# Altium PCB PCB1.PcbDoc
Units mm, origin at the board's own origin, x right, y up, seen from the top; angles counter-clockwise.
Board outline 76.2 x 78.74 mm, 2 copper layers (Top Layer, Bottom Layer); 10 components, 8 nets, 28 pads, 4 vias.
Unrouted connection lines stored in the file: 7.
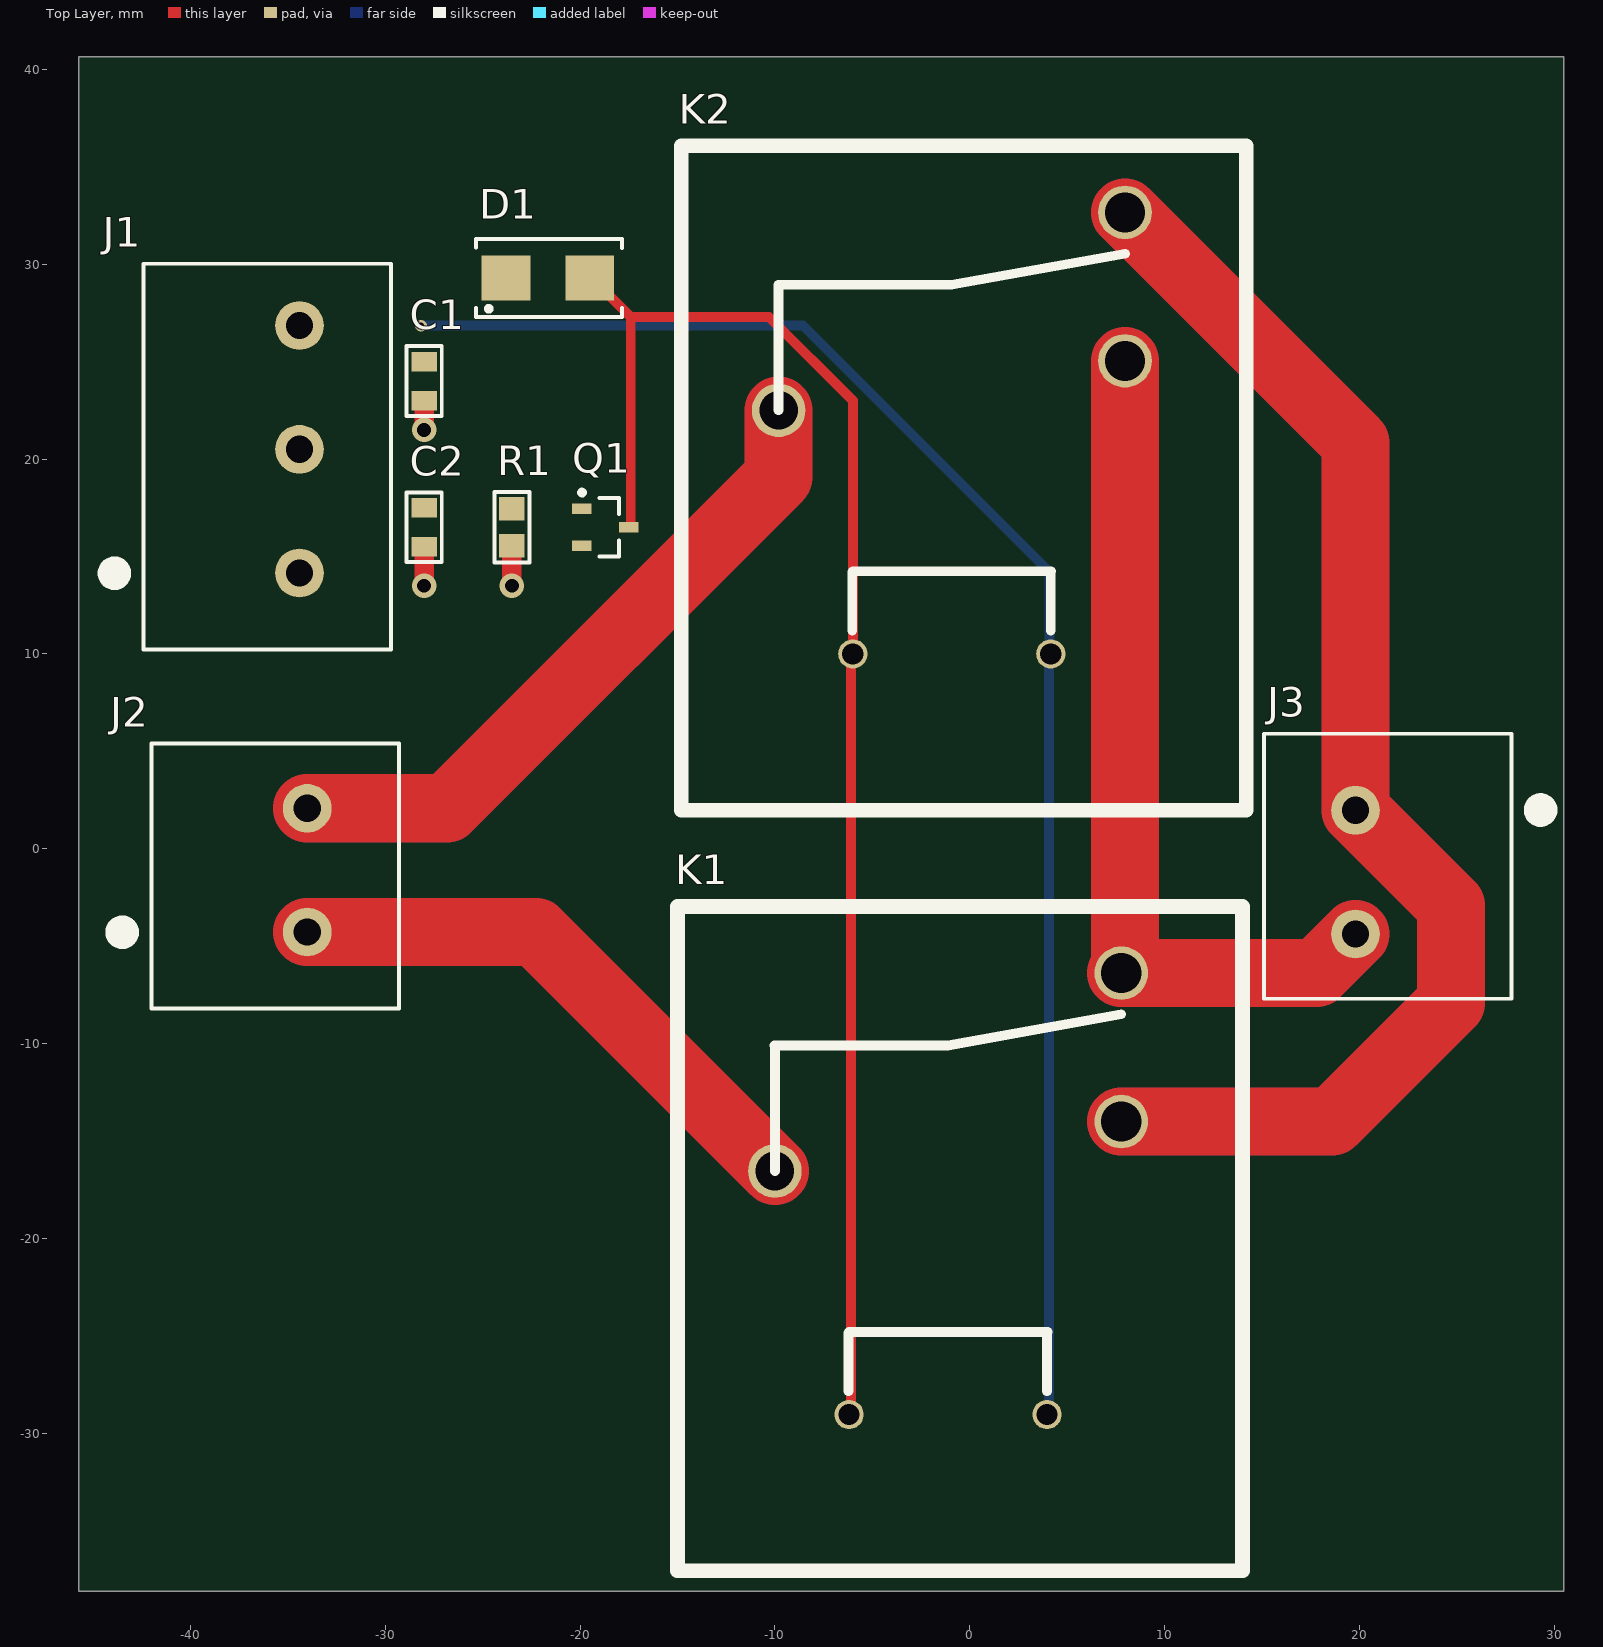
[diagram p0: Top Layer view]
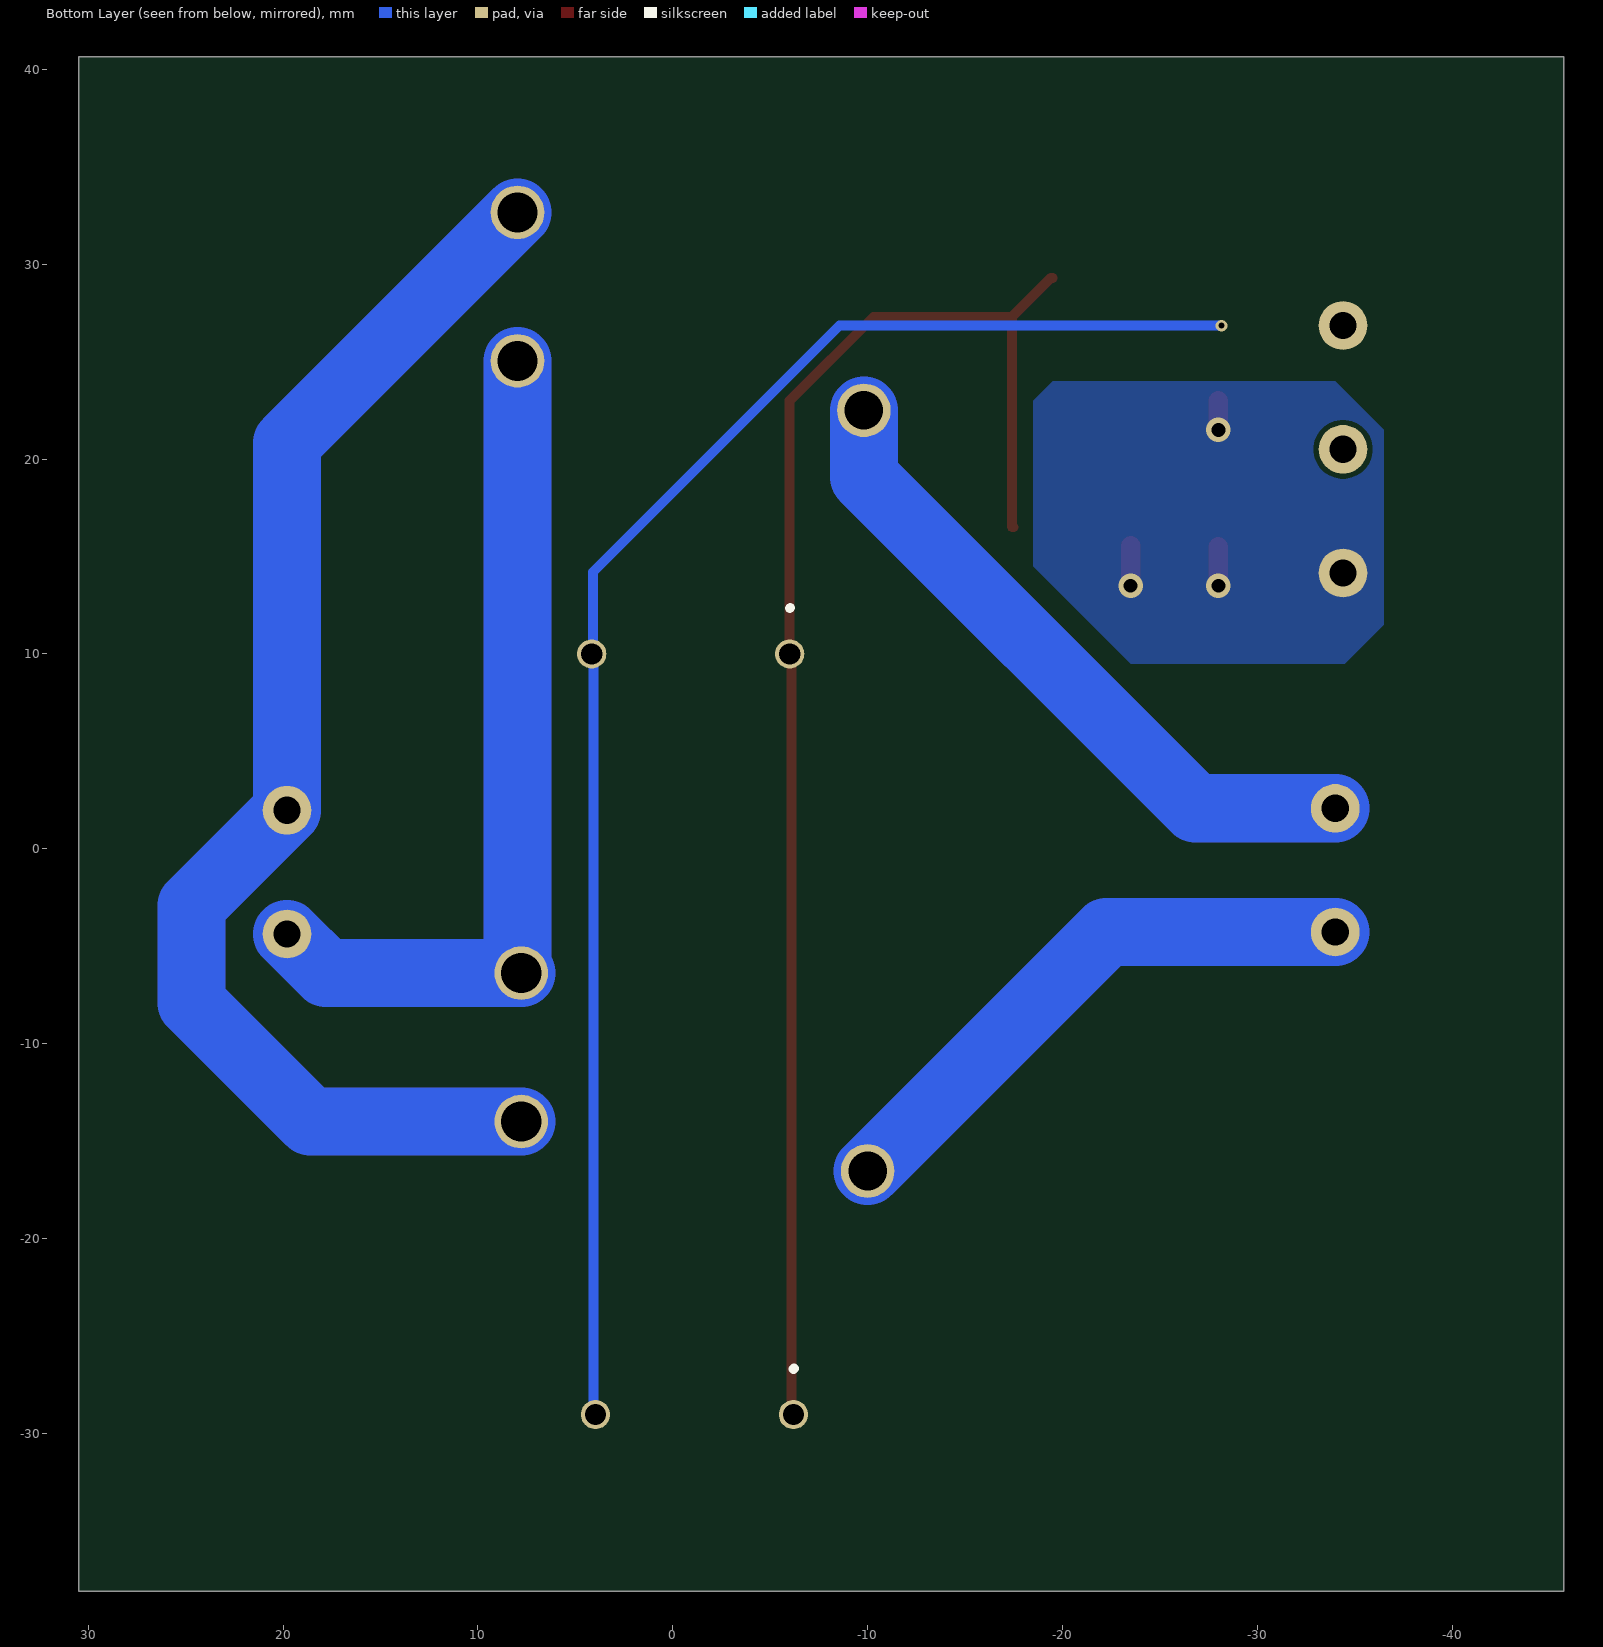
[diagram p1: Bottom Layer view, seen from below]
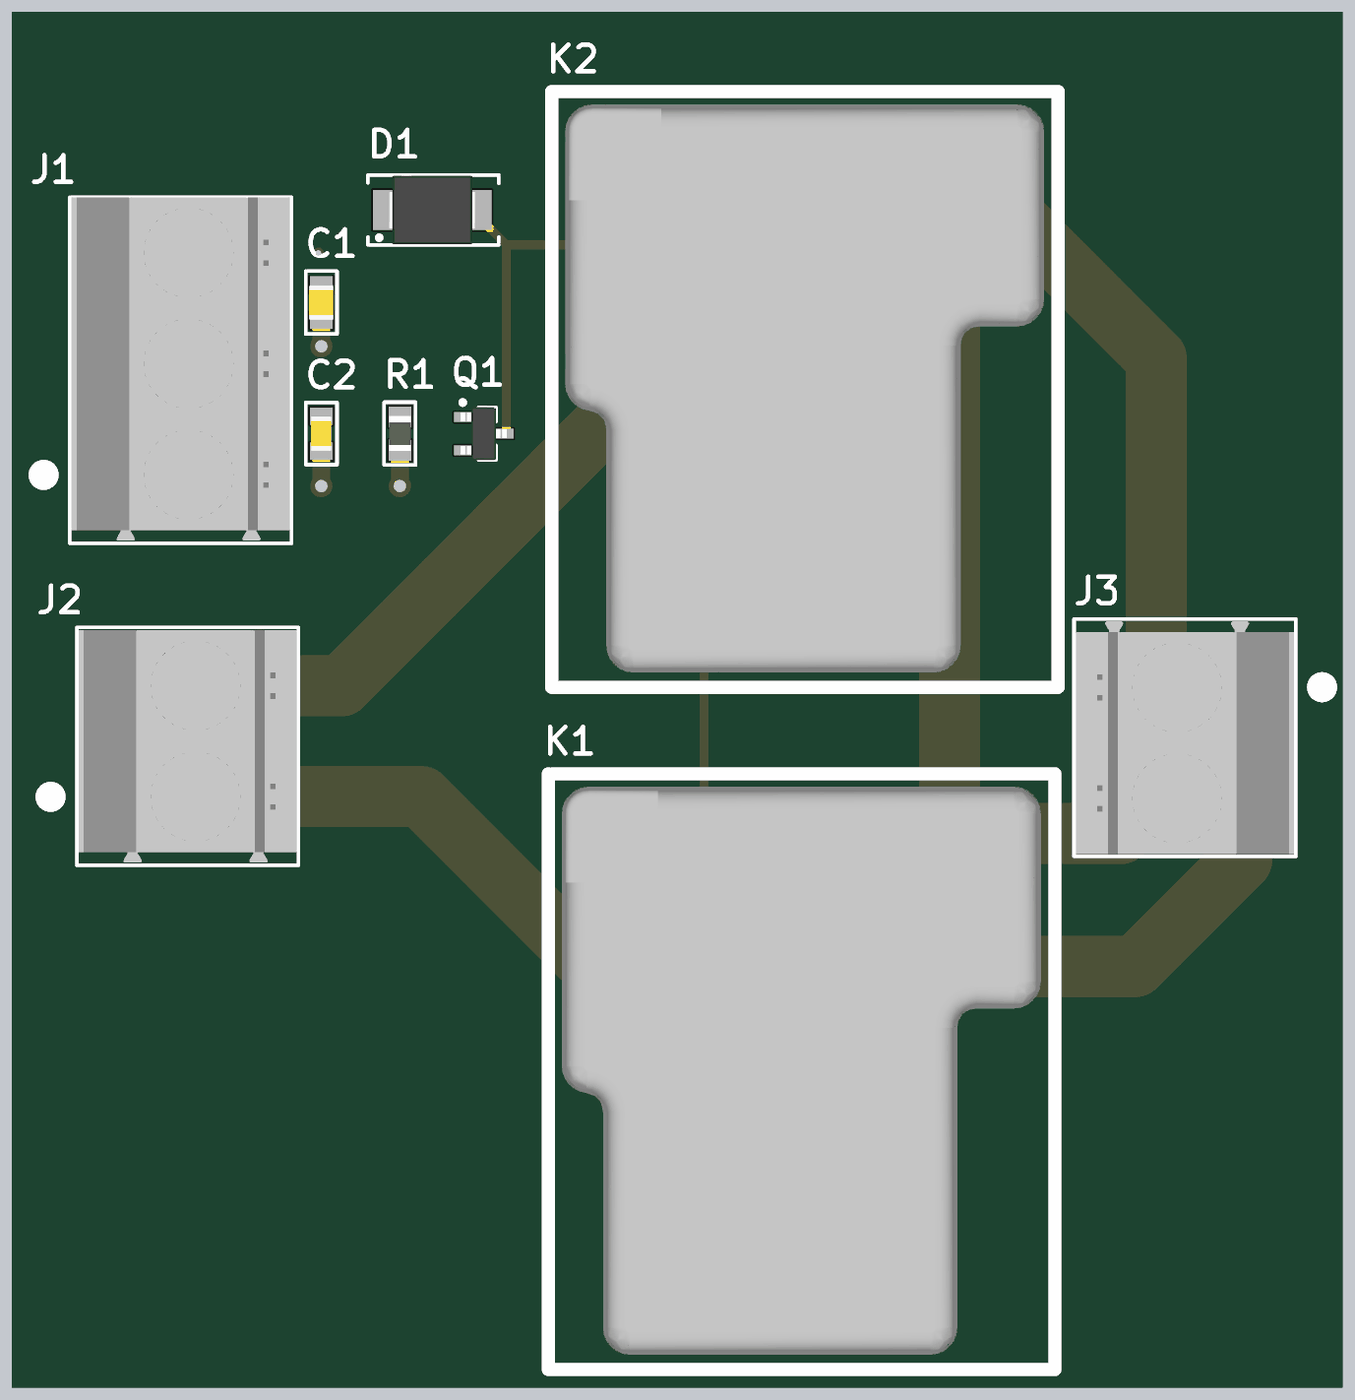
[diagram p2: 3D render of the assembled board from above, using the file's embedded part models]

## Layer stack, top to bottom
Top Solder: solder mask 0.0102, Solder Resist, Dk 3.5
Top Layer: signal copper 0.0356
Dielectric 1: dielectric 0.32, FR-4, Dk 4.8
Bottom Layer: signal copper 0.0356
Bottom Solder: solder mask 0.0102, Solder Resist, Dk 3.5

## Board outline
-45.72,40.64 -45.72,-38.1 30.48,-38.1 30.48,40.64

## Design rules (kind name [scope] priority, off if disabled: settings)
Clearance [All] p1: gap=0.254 ignorepadtopadclearanceinfootprint=FALSE except(0: Arc-Hole Track-Hole SMDPad-Hole THPad-Hole Via-Hole Fill-Hole Poly-Hole Region-Hole Text-Hole)
Height [All] p1: minheight=0 maxheight=127 prefheight=12.7
HoleSize [All] p1: absolutevalues=TRUE maxlimit=25.4 minlimit=0.025 maxpercent=80.000 minpercent=20.000
PolygonConnect [All] p1: connectstyle=Direct reliefconductorwidth=0.254 reliefentries=4 polygonreliefangle="90 Angle" airgapwidth=0.254
RoutingVias [All] p1: holewidth=0.711 width=1.27 viastyle="Through Hole" minholewidth=0.711 minwidth=1.27 maxholewidth=0.711 maxwidth=1.27
SolderMaskExpansion [All] p1: expansion=0.102 istentingtop=FALSE
Width [All] p1: maxlimit=25.4 minlimit=0.254 preferedwidth=0.254
28 further rules are at their usual default settings.

## Components (designator, comment, footprint, x,y, rotation, side; value= is the part's Value field where it differs from the comment)
C1 "C0805C106K4PACTU" C0805C106K4PACTU -28,24 r90 top
C2 "C0805C104K5RACTU" C0805C104K5RACTU -28,16.5 r90 top
D1 "S1GB-13-F" S1GB-13-F -21.65,29.3 r180 top
J1 "796740-3" 796740-3 -34.4,20.5 r90 top
J2 "796740-2" 796740-2 -34,-1.1 r90 top
J3 "796740-2" 796740-2 19.8,-1.2 r270 top
K1 "T9AS5D12-5" T9AS5D12-5 -10,-14 r0 top
K2 "T9AS5D12-5" T9AS5D12-5 -9.81,25.04 r0 top
Q1 "SI2312BDS-T1-E3" SI2312BDS-T1-E3 -18.7,16.5 r0 top
R1 "RC0805JR-0710KL" RC0805JR-0710KL -23.5,16.5 r90 top

## Footprints (in the part's own frame and the unit in brackets; to place one, negate y for a bottom-side part, rotate by r counter-clockwise, add the part's x,y. Pads: shape width x height; smd on the part's side, far side on the other; paste and mask are expansions set on the pad)
796740-2 [mm]
  round 2.5 hole 1.4: 1(-3.175,0) 2(3.175,0)
  silkscreen extent -7.1,-4.7 6.5,9.91, body extent -6.95,-4.6 6.35,7.9, height 21.51
796740-3 [mm]
  round 2.5 hole 1.4: 1(-6.35,0) 2(0,0) 3(6.35,0)
  silkscreen extent -10.28,-4.7 9.53,9.91, body extent -10.12,-4.6 9.53,7.9, height 21.51
C0805C104K5RACTU [mm]
  rect 1x1.3 smd: 1(-1,0) 2(1,0)
  silkscreen extent -1.78,-0.9 1.78,0.9, body extent -1,-0.6 1,0.6, height 0.89
C0805C106K4PACTU [mm]
  rect 1x1.3 smd: 1(-1,0) 2(1,0)
  silkscreen extent -1.8,-0.9 1.8,0.9, body extent -1,-0.7 1,0.7, height 1.21
RC0805JR-0710KL [mm]
  rect 1.2x1.3 smd: 1(-0.95,0) 2(0.95,0)
  silkscreen extent -1.8,-0.9 1.8,0.9, body extent -1,-0.62 1,0.62, height 0.61
S1GB-13-F [mm]
  rect 2.5x2.3 smd: 1(-2.15,0) 2(2.15,0)
  silkscreen extent -3.81,-2 3.68,2, body extent -2.5,-1.97 2.5,1.97, height 2.5
SI2312BDS-T1-E3 [mm]
  rect 1x0.559 smd: 1(-1.2,0.95) 2(-1.2,-0.95) 3(1.2,0)
  silkscreen extent -1.32,-1.5 0.7,1.9, body extent -1.32,-1.52 1.32,1.52, height 1.12
T9AS5D12-5 [mm]
  round 2.75 hole 2.06: 1(17.78,7.62) 2(17.78,0)
  round 2.75 hole 1.98: 3(0,-2.54)
  round 1.5 hole 1.09: 4(13.97,-15.04) 5(3.81,-15.04)
  silkscreen extent -5,-23.06 24,11.03, body extent -4.23,-22.22 23.2,10.3, height 20.05

## Part data
C1: "CERAMIC CAPACITOR, 10UF, 16V, X5R, 10%, 0805", Capacitance=10uF, Case/Package=0805, Manufacturer 1=KEMET, Supplier Part Number 1=399-8012-1-ND, Voltage Rating=16V, Manufacturer Part Number 1=C0805C106K4PACTU, Supplier 1=Digi-Key
C2: "Cap Ceramic 0.1uF 50V X7R 10% SMD 2.0 x 1.2 mm 125 C Paper T/R", Capacitance=100nF, Case/Package=0805, Manufacturer 1=KEMET, Supplier Part Number 1=399-1170-1-ND, Voltage Rating=50V, Manufacturer Part Number 1=C0805C104K5RACTU, Supplier 1=Digi-Key
D1: "Flyback Diode for SPDT", Manufacturer 1="Diodes Incorporated", Supplier Part Number 1=S1GB-FDICT-ND, IFSM=8.0A, Manufacturer Part Number 1=S1GB-13-F, Supplier 1=Digi-Key, VRRM=325V
J1: "TERM BLK 3P SIDE ENT 6.35MM PCB", Manufacturer 1="TE Connectivity AMP Connectors", Supplier Part Number 1=A98276-ND, Manufacturer Part Number 1=796740-3, Supplier 1=Digi-Key
J2 J3: "TERMINAL BLOCK, PLUG, 2POS, 24-10AWG", Current Rating=30A, Manufacturer="TE Connectivity", Supplier Part Number 1=A98275-ND, Voltage Rating=300V, Manufacturer Part Number=796740-2, Supplier 1=Digi-Key
K1 K2: "RELAY GEN PURPOSE SPDT 20A 5V", Coil Current=200mA, Coil Voltage (DC)=5V, Contact Current Rating=20A, Contact Voltage Rating (AC)=277V, Current Rating=30A, Manufacturer 1="TE Connectivity Potter & Brumfield Relays", Supplier Part Number 1=T9AS5D12-5-ND, Manufacturer Part Number 1=T9AS5D12-5, Supplier 1=Digi-Key, Voltage Rating (DC)=5V
Q1: "MOSFET", Manufacturer 1="Vishay Siliconix", Supplier Part Number 1=SI2312BDS-T1-E3CT-ND, Manufacturer Part Number 1=SI2312BDS-T1-E3, Supplier 1=Digi-Key
R1: "Res Thick Film 0805 10K Ohm 5% 1/8W ±100ppm/°C Molded SMD Paper T/R", Manufacturer 1=Yageo, Package=0805, Resistance=10kR, Supplier Part Number 1=311-10KARCT-ND, Tolerance=5%, Manufacturer Part Number 1=RC0805JR-0710KL, Supplier 1=Digi-Key

## Via types
v1: diameter 1.27, hole 0.711, Top Layer to Bottom Layer, tented both sides, 3 vias
v2: diameter 0.6, hole 0.3, Top Layer to Bottom Layer, tented both sides, 1 vias

## Nets (pads, with @x,y where several pads share a name; then routed paths per layer and width w, separated by ;. In a path a pad name is that pad's centre, name@x,y a point inside that pad or via, vN(x,y) a via of type N, cw(c..) or ccw(c..) an arc to the next point about the centre after c; other vN are vias at no path point)
5V: C1.2 D1.2 J1.3 K1.4 K2.4 | length 80.8
  Bottom Layer w0.508: v2(-28.165,26.85) -8.55,26.85 4.1,14.2 4.1,10.06 K2.4 4.065,9.905 4.065,-28.945 K1.4
ENABLE_REVERSE: C2.2 J1.2 Q1.1 R1.2
GND: C1.1 C2.1 J1.1 Q1.2 R1.1 | length 5.5
  Top Layer w1: v1(-28,13.5) C2.1 ; v1(-28,21.5) C1.1 ; v1(-23.5,13.5) R1.1
IN_PHASE_A: J2.1 K1.3 | length 58.2
  Top Layer w3.5: J2.1 -22.265,-4.275 K1.3
  Bottom Layer w3.5: J2.1 -22.265,-4.275 K1.3
IN_PHASE_B: J2.2 K2.3 | length 69.3
  Top Layer w3.5: J2.2 -26.825,2.075 -9.81,19.09 K2.3
  Bottom Layer w3.5: J2.2 -26.825,2.075 -9.81,19.09 K2.3
OUT_PHASE_A: J3.2 K1.1 K2.2 | length 88.7
  Top Layer w3: K1.1 K1.1@7.97,-6.19
  Top Layer w3.5: K1.1 17.795,-6.38 J3.2 ; K1.1@7.97,-6.19 K2.2
  Bottom Layer w3.5: K2.2 7.97,-6.19 K1.1 17.795,-6.38 J3.2
OUT_PHASE_B: J3.1 K1.2 K2.1 | length 133.9
  Top Layer w3.5: K1.2 18.6,-14 24.7,-7.9 24.7,-2.925 J3.1 19.8,20.83 K2.1
  Bottom Layer w3.5: K1.2 18.6,-14 24.7,-7.9 24.7,-2.925 J3.1 19.8,20.83 K2.1
PHASE_CONTROL_FET: D1.1 K1.5 K2.5 Q1.3 | length 79.1
  Top Layer w0.508: D1.1 -19.4,29.3 -17.4,27.3 ; Q1.3 -17.426,16.5 -17.4,16.526 -17.4,27.3 ; K1.5 -6.095,-28.945 -6.095,9.905 K2.5 -6,23 -10.3,27.3 -17.4,27.3

## Polygon pours and split planes (outlines as drawn)
GND on Bottom Layer "GND_L02_P000" (solid, remove dead copper, pour order 0): -36.5,11.5 -34.5,9.5 -23.5,9.5 -18.5,14.5 -18.5,23 -19.5,24 -34,24 -36.5,21.5 -36.5,15.5